# EAGLE board LilyTiny-Panel (EAGLE 6.1), part 1 of 2
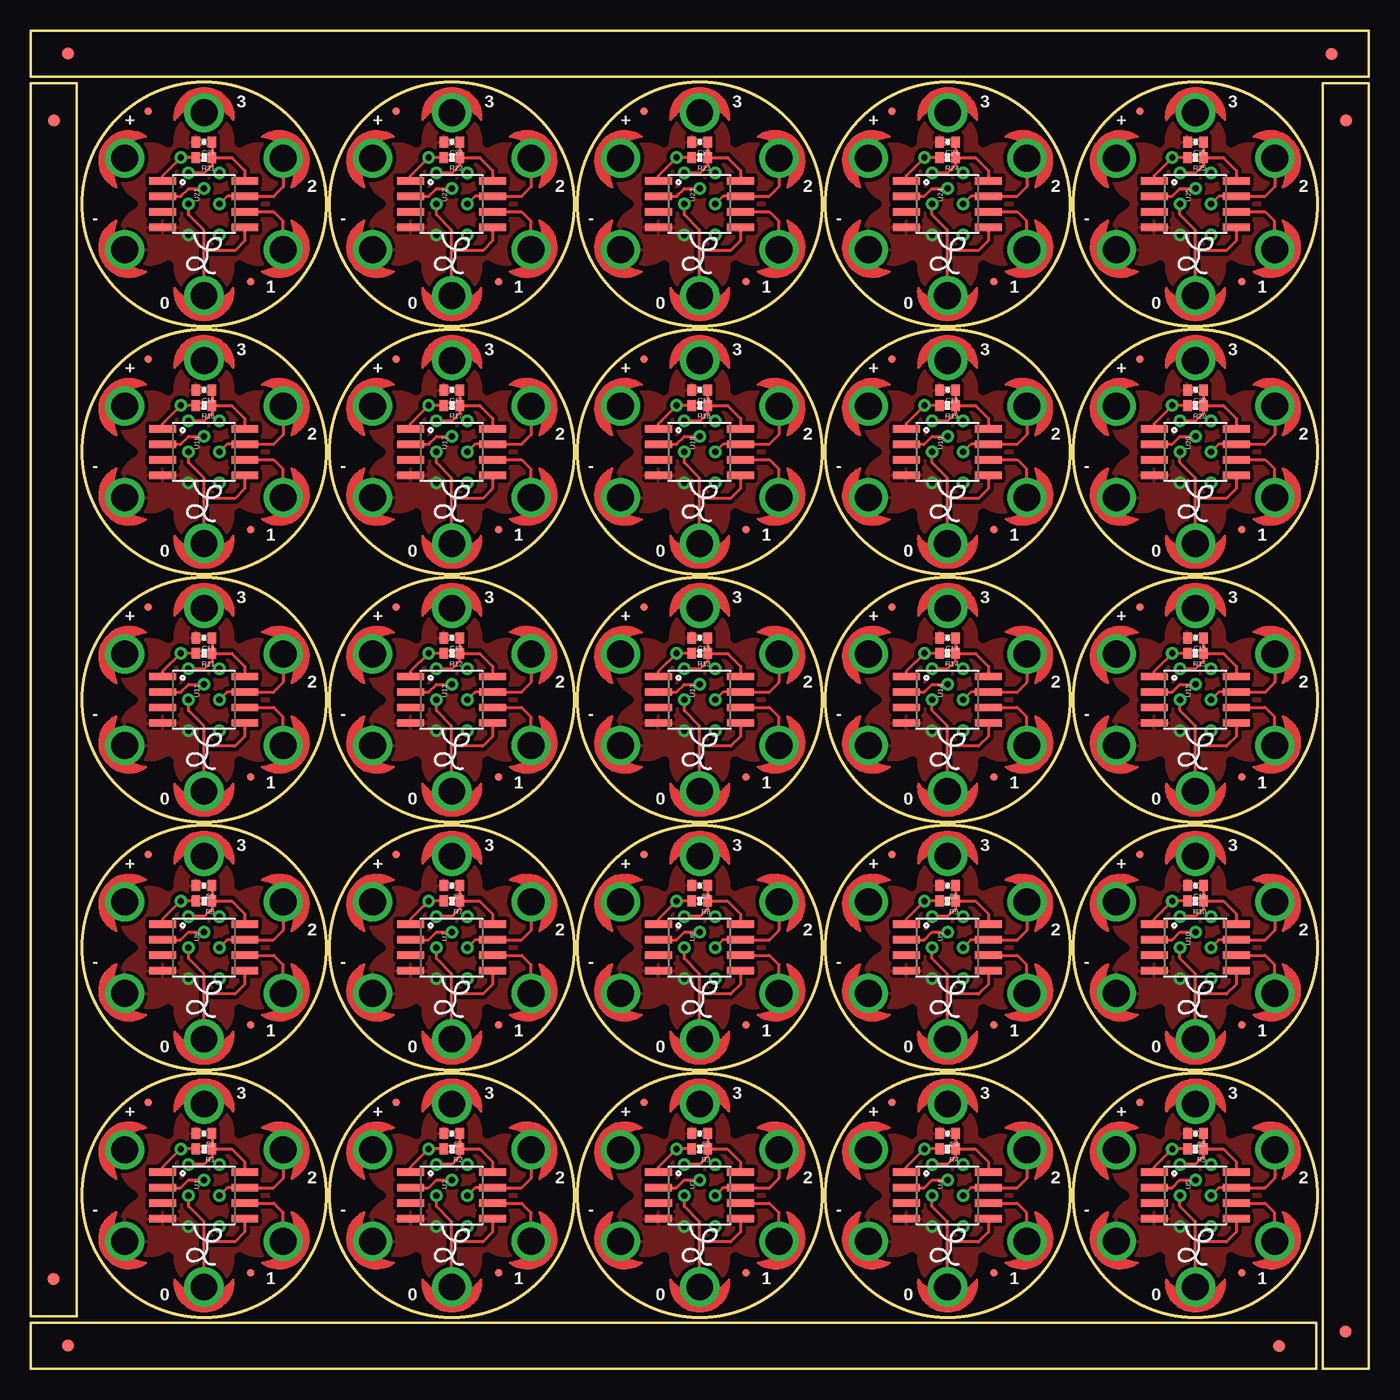
[diagram p0: board, top side]
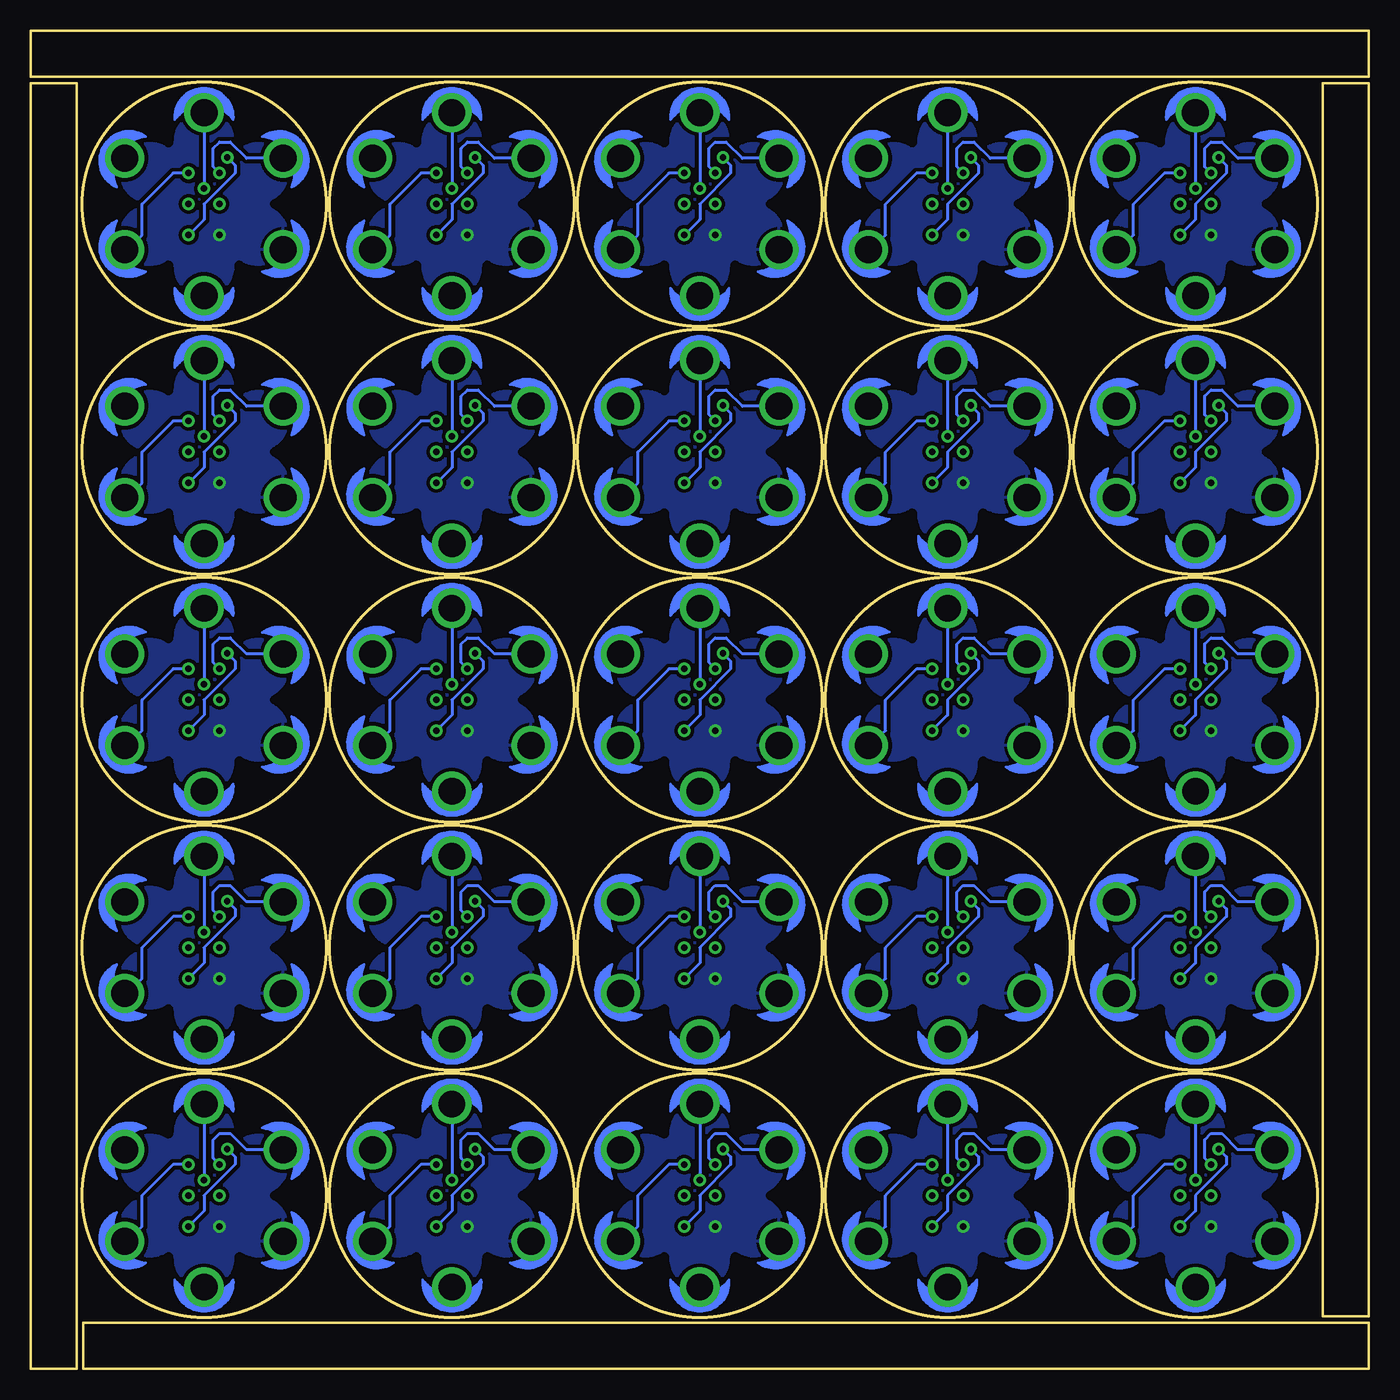
[diagram p1: board, bottom side, seen from below]

Size 109.73 x 109.73 mm. Coordinates in mm from the lower left corner, seen from the top.
Outline: 3.81,6.86 3.81,25.91
Outline: 3.81,25.91 3.81,93.22
Outline: 3.81,25.91 3.81,4.32 0,4.32 0,27.18
Outline: 2.54,0 21.59,0
Outline: 21.59,0 88.9,0
Outline: 21.59,0 0,0 0,3.81 22.86,3.81
Outline: 0,102.87 0,83.82
Outline: 0,83.82 0,16.51
Outline: 0,83.82 0,105.41 3.81,105.41 3.81,82.55
Outline: 105.92,102.87 105.92,83.82
Outline: 105.92,83.82 105.92,16.51
Outline: 105.92,83.82 105.92,105.41 109.73,105.41 109.73,82.55
Outline: 107.19,109.73 88.14,109.73
Outline: 88.14,109.73 20.83,109.73
Outline: 88.14,109.73 109.73,109.73 109.73,105.92 86.87,105.92
Outline: 2.54,105.92 21.59,105.92
Outline: 21.59,105.92 88.9,105.92
Outline: 21.59,105.92 0,105.92 0,109.73 22.86,109.73
Outline: 109.73,2.54 109.73,21.59
Outline: 109.73,21.59 109.73,88.9
Outline: 109.73,21.59 109.73,0 105.92,0 105.92,22.86
Outline: 102.87,3.81 83.82,3.81
Outline: 83.82,3.81 16.51,3.81
Outline: 83.82,3.81 105.41,3.81 105.41,0 82.55,0
Outline: circle at 14.22,14.22 radius 10
Outline: circle at 34.54,14.22 radius 10
Outline: circle at 54.86,14.22 radius 10
Outline: circle at 75.18,14.22 radius 10
Outline: circle at 95.5,14.22 radius 10
Outline: circle at 14.22,34.54 radius 10
Outline: circle at 34.54,34.54 radius 10
Outline: circle at 54.86,34.54 radius 10
Outline: circle at 75.18,34.54 radius 10
Outline: circle at 95.5,34.54 radius 10
Outline: circle at 14.22,54.86 radius 10
Outline: circle at 34.54,54.86 radius 10
Outline: circle at 54.86,54.86 radius 10
Outline: circle at 75.18,54.86 radius 10
Outline: circle at 95.5,54.86 radius 10
Outline: circle at 14.22,75.18 radius 10
Outline: circle at 34.54,75.18 radius 10
Outline: circle at 54.86,75.18 radius 10
Outline: circle at 75.18,75.18 radius 10
Outline: circle at 95.5,75.18 radius 10
Copper layers (1*16): Top 0.035mm / dielectric 1.5mm / Bottom 0.035mm
Design rules: minimum track width 8mil, minimum drill 20mil, track to track 8mil, track to pad 8mil, pad to pad 8mil, via to via 8mil, smd to smd 8mil, copper to edge 8mil, drill to drill 8mil, minimum pad ring 12mil, minimum via ring 10mil, stop-mask expansion 4mil, vias tented up to drill 20mil, thermal gap 10mil
tRestrict: area 3.2,14.2 to 14.2,25.2; area 14.2,14.2 to 25.2,25.2; area 14.2,3.2 to 25.2,14.2; area 3.2,3.2 to 14.2,14.2; area 23.5,14.2 to 34.5,25.2; area 34.5,14.2 to 45.5,25.2; area 34.5,3.2 to 45.5,14.2; area 23.5,3.2 to 34.5,14.2; area 43.9,14.2 to 54.9,25.2; area 54.9,14.2 to 65.9,25.2; area 54.9,3.2 to 65.9,14.2; area 43.9,3.2 to 54.9,14.2; area 64.2,14.2 to 75.2,25.2; area 75.2,14.2 to 86.2,25.2; area 75.2,3.2 to 86.2,14.2; area 64.2,3.2 to 75.2,14.2; area 84.5,14.2 to 95.5,25.2; area 95.5,14.2 to 106.5,25.2; area 95.5,3.2 to 106.5,14.2; area 84.5,3.2 to 95.5,14.2; area 3.2,34.5 to 14.2,45.5; area 14.2,34.5 to 25.2,45.5; area 14.2,23.5 to 25.2,34.5; area 3.2,23.5 to 14.2,34.5; area 23.5,34.5 to 34.5,45.5; area 34.5,34.5 to 45.5,45.5; area 34.5,23.5 to 45.5,34.5; area 23.5,23.5 to 34.5,34.5; area 43.9,34.5 to 54.9,45.5; area 54.9,34.5 to 65.9,45.5; area 54.9,23.5 to 65.9,34.5; area 43.9,23.5 to 54.9,34.5; area 64.2,34.5 to 75.2,45.5; area 75.2,34.5 to 86.2,45.5; area 75.2,23.5 to 86.2,34.5; area 64.2,23.5 to 75.2,34.5; area 84.5,34.5 to 95.5,45.5; area 95.5,34.5 to 106.5,45.5; area 95.5,23.5 to 106.5,34.5; area 84.5,23.5 to 95.5,34.5; area 3.2,54.9 to 14.2,65.9; area 14.2,54.9 to 25.2,65.9; area 14.2,43.9 to 25.2,54.9; area 3.2,43.9 to 14.2,54.9; area 23.5,54.9 to 34.5,65.9; area 34.5,54.9 to 45.5,65.9; area 34.5,43.9 to 45.5,54.9; area 23.5,43.9 to 34.5,54.9; area 43.9,54.9 to 54.9,65.9; area 54.9,54.9 to 65.9,65.9; area 54.9,43.9 to 65.9,54.9; area 43.9,43.9 to 54.9,54.9; area 64.2,54.9 to 75.2,65.9; area 75.2,54.9 to 86.2,65.9; area 75.2,43.9 to 86.2,54.9; area 64.2,43.9 to 75.2,54.9; area 84.5,54.9 to 95.5,65.9; area 95.5,54.9 to 106.5,65.9; area 95.5,43.9 to 106.5,54.9; area 84.5,43.9 to 95.5,54.9; area 3.2,75.2 to 14.2,86.2; area 14.2,75.2 to 25.2,86.2; area 14.2,64.2 to 25.2,75.2; area 3.2,64.2 to 14.2,75.2; area 23.5,75.2 to 34.5,86.2; area 34.5,75.2 to 45.5,86.2; area 34.5,64.2 to 45.5,75.2; area 23.5,64.2 to 34.5,75.2; area 43.9,75.2 to 54.9,86.2; area 54.9,75.2 to 65.9,86.2; area 54.9,64.2 to 65.9,75.2; area 43.9,64.2 to 54.9,75.2; area 64.2,75.2 to 75.2,86.2; area 75.2,75.2 to 86.2,86.2; area 75.2,64.2 to 86.2,75.2; area 64.2,64.2 to 75.2,75.2; area 84.5,75.2 to 95.5,86.2; area 95.5,75.2 to 106.5,86.2; area 95.5,64.2 to 106.5,75.2; area 84.5,64.2 to 95.5,75.2; area 3.2,95.5 to 14.2,106.5; area 14.2,95.5 to 25.2,106.5; area 14.2,84.5 to 25.2,95.5; area 3.2,84.5 to 14.2,95.5; area 23.5,95.5 to 34.5,106.5; area 34.5,95.5 to 45.5,106.5; area 34.5,84.5 to 45.5,95.5; area 23.5,84.5 to 34.5,95.5; area 43.9,95.5 to 54.9,106.5; area 54.9,95.5 to 65.9,106.5; area 54.9,84.5 to 65.9,95.5; area 43.9,84.5 to 54.9,95.5; area 64.2,95.5 to 75.2,106.5; area 75.2,95.5 to 86.2,106.5; area 75.2,84.5 to 86.2,95.5; area 64.2,84.5 to 75.2,95.5; area 84.5,95.5 to 95.5,106.5; area 95.5,95.5 to 106.5,106.5; area 95.5,84.5 to 106.5,95.5; area 84.5,84.5 to 95.5,95.5; 150 lines
bRestrict: area 3.2,14.2 to 14.2,25.2; area 14.2,14.2 to 25.2,25.2; area 14.2,3.2 to 25.2,14.2; area 3.2,3.2 to 14.2,14.2; area 23.5,14.2 to 34.5,25.2; area 34.5,14.2 to 45.5,25.2; area 34.5,3.2 to 45.5,14.2; area 23.5,3.2 to 34.5,14.2; area 43.9,14.2 to 54.9,25.2; area 54.9,14.2 to 65.9,25.2; area 54.9,3.2 to 65.9,14.2; area 43.9,3.2 to 54.9,14.2; area 64.2,14.2 to 75.2,25.2; area 75.2,14.2 to 86.2,25.2; area 75.2,3.2 to 86.2,14.2; area 64.2,3.2 to 75.2,14.2; area 84.5,14.2 to 95.5,25.2; area 95.5,14.2 to 106.5,25.2; area 95.5,3.2 to 106.5,14.2; area 84.5,3.2 to 95.5,14.2; area 3.2,34.5 to 14.2,45.5; area 14.2,34.5 to 25.2,45.5; area 14.2,23.5 to 25.2,34.5; area 3.2,23.5 to 14.2,34.5; area 23.5,34.5 to 34.5,45.5; area 34.5,34.5 to 45.5,45.5; area 34.5,23.5 to 45.5,34.5; area 23.5,23.5 to 34.5,34.5; area 43.9,34.5 to 54.9,45.5; area 54.9,34.5 to 65.9,45.5; area 54.9,23.5 to 65.9,34.5; area 43.9,23.5 to 54.9,34.5; area 64.2,34.5 to 75.2,45.5; area 75.2,34.5 to 86.2,45.5; area 75.2,23.5 to 86.2,34.5; area 64.2,23.5 to 75.2,34.5; area 84.5,34.5 to 95.5,45.5; area 95.5,34.5 to 106.5,45.5; area 95.5,23.5 to 106.5,34.5; area 84.5,23.5 to 95.5,34.5; area 3.2,54.9 to 14.2,65.9; area 14.2,54.9 to 25.2,65.9; area 14.2,43.9 to 25.2,54.9; area 3.2,43.9 to 14.2,54.9; area 23.5,54.9 to 34.5,65.9; area 34.5,54.9 to 45.5,65.9; area 34.5,43.9 to 45.5,54.9; area 23.5,43.9 to 34.5,54.9; area 43.9,54.9 to 54.9,65.9; area 54.9,54.9 to 65.9,65.9; area 54.9,43.9 to 65.9,54.9; area 43.9,43.9 to 54.9,54.9; area 64.2,54.9 to 75.2,65.9; area 75.2,54.9 to 86.2,65.9; area 75.2,43.9 to 86.2,54.9; area 64.2,43.9 to 75.2,54.9; area 84.5,54.9 to 95.5,65.9; area 95.5,54.9 to 106.5,65.9; area 95.5,43.9 to 106.5,54.9; area 84.5,43.9 to 95.5,54.9; area 3.2,75.2 to 14.2,86.2; area 14.2,75.2 to 25.2,86.2; area 14.2,64.2 to 25.2,75.2; area 3.2,64.2 to 14.2,75.2; area 23.5,75.2 to 34.5,86.2; area 34.5,75.2 to 45.5,86.2; area 34.5,64.2 to 45.5,75.2; area 23.5,64.2 to 34.5,75.2; area 43.9,75.2 to 54.9,86.2; area 54.9,75.2 to 65.9,86.2; area 54.9,64.2 to 65.9,75.2; area 43.9,64.2 to 54.9,75.2; area 64.2,75.2 to 75.2,86.2; area 75.2,75.2 to 86.2,86.2; area 75.2,64.2 to 86.2,75.2; area 64.2,64.2 to 75.2,75.2; area 84.5,75.2 to 95.5,86.2; area 95.5,75.2 to 106.5,86.2; area 95.5,64.2 to 106.5,75.2; area 84.5,64.2 to 95.5,75.2; area 3.2,95.5 to 14.2,106.5; area 14.2,95.5 to 25.2,106.5; area 14.2,84.5 to 25.2,95.5; area 3.2,84.5 to 14.2,95.5; area 23.5,95.5 to 34.5,106.5; area 34.5,95.5 to 45.5,106.5; area 34.5,84.5 to 45.5,95.5; area 23.5,84.5 to 34.5,95.5; area 43.9,95.5 to 54.9,106.5; area 54.9,95.5 to 65.9,106.5; area 54.9,84.5 to 65.9,95.5; area 43.9,84.5 to 54.9,95.5; area 64.2,95.5 to 75.2,106.5; area 75.2,95.5 to 86.2,106.5; area 75.2,84.5 to 86.2,95.5; area 64.2,84.5 to 75.2,95.5; area 84.5,95.5 to 95.5,106.5; area 95.5,95.5 to 106.5,106.5; area 95.5,84.5 to 106.5,95.5; area 84.5,84.5 to 95.5,95.5; 150 lines

## Footprints (pad centres in the part's own frame; a part is rotated, then mirrored left to right if it is on the bottom)
0402-CAP = smd 0.7 x 0.9: 1 -0.65,0; 2 0.65,0
FIDUCIAL-1X2 = smd 1 x 1: 1 0,0
MICRO-FIDUCIAL = smd 0.635 x 0.635: 1 0,0
0402-RES = smd 0.7 x 0.9: 1 -0.65,0; 2 0.65,0
SO08-EIAJ = smd 0.61 x 2.21: 1 -1.905,-3.378; 2 -0.635,-3.378; 3 0.635,-3.378; 4 1.905,-3.378; 5 1.905,3.353; 6 0.635,3.353; 7 -0.635,3.353; 8 -1.905,3.353
PETAL-SMALL-2SIDE = drill 2.2: 1 0,0

## Placement (x,y rotation side)
C1  0.1uF  [0402-CAP]  14.22,19.3 180 top
C2  0.1uF  [0402-CAP]  34.54,19.3 180 top
C3  0.1uF  [0402-CAP]  54.86,19.3 180 top
C4  0.1uF  [0402-CAP]  75.18,19.3 180 top
C5  0.1uF  [0402-CAP]  95.5,19.3 180 top
C6  0.1uF  [0402-CAP]  14.22,39.62 180 top
C7  0.1uF  [0402-CAP]  34.54,39.62 180 top
C8  0.1uF  [0402-CAP]  54.86,39.62 180 top
C9  0.1uF  [0402-CAP]  75.18,39.62 180 top
C10  0.1uF  [0402-CAP]  95.5,39.62 180 top
C11  0.1uF  [0402-CAP]  14.22,59.94 180 top
C12  0.1uF  [0402-CAP]  34.54,59.94 180 top
C13  0.1uF  [0402-CAP]  54.86,59.94 180 top
C14  0.1uF  [0402-CAP]  75.18,59.94 180 top
C15  0.1uF  [0402-CAP]  95.5,59.94 180 top
C16  0.1uF  [0402-CAP]  14.22,80.26 180 top
C17  0.1uF  [0402-CAP]  34.54,80.26 180 top
C18  0.1uF  [0402-CAP]  54.86,80.26 180 top
C19  0.1uF  [0402-CAP]  75.18,80.26 180 top
C20  0.1uF  [0402-CAP]  95.5,80.26 180 top
C21  0.1uF  [0402-CAP]  14.22,100.58 180 top
C22  0.1uF  [0402-CAP]  34.54,100.58 180 top
C23  0.1uF  [0402-CAP]  54.86,100.58 180 top
C24  0.1uF  [0402-CAP]  75.18,100.58 180 top
C25  0.1uF  [0402-CAP]  95.5,100.58 180 top
E$1  [FIDUCIAL-1X2]  3.07,1.93 90 top
E$2  [FIDUCIAL-1X2]  1.88,7.39 180 top
E$3  [FIDUCIAL-1X2]  1.93,102.34 0 top
E$4  [FIDUCIAL-1X2]  107.85,102.34 0 top
E$5  [FIDUCIAL-1X2]  106.65,107.8 270 top
E$6  [FIDUCIAL-1X2]  3.07,107.85 90 top
E$7  [FIDUCIAL-1X2]  107.8,3.07 180 top
E$8  [FIDUCIAL-1X2]  102.34,1.88 270 top
JP1  FIDUCIALUFIDUCIAL  [MICRO-FIDUCIAL]  9.65,21.84 0 top
JP2  FIDUCIALUFIDUCIAL  [MICRO-FIDUCIAL]  18.03,7.87 0 top
JP3  FIDUCIALUFIDUCIAL  [MICRO-FIDUCIAL]  29.97,21.84 0 top
JP4  FIDUCIALUFIDUCIAL  [MICRO-FIDUCIAL]  38.35,7.87 0 top
JP5  FIDUCIALUFIDUCIAL  [MICRO-FIDUCIAL]  50.29,21.84 0 top
JP6  FIDUCIALUFIDUCIAL  [MICRO-FIDUCIAL]  58.67,7.87 0 top
JP7  FIDUCIALUFIDUCIAL  [MICRO-FIDUCIAL]  70.61,21.84 0 top
JP8  FIDUCIALUFIDUCIAL  [MICRO-FIDUCIAL]  78.99,7.87 0 top
JP9  FIDUCIALUFIDUCIAL  [MICRO-FIDUCIAL]  90.93,21.84 0 top
JP10  FIDUCIALUFIDUCIAL  [MICRO-FIDUCIAL]  99.31,7.87 0 top
JP11  FIDUCIALUFIDUCIAL  [MICRO-FIDUCIAL]  9.65,42.16 0 top
JP12  FIDUCIALUFIDUCIAL  [MICRO-FIDUCIAL]  18.03,28.19 0 top
JP13  FIDUCIALUFIDUCIAL  [MICRO-FIDUCIAL]  29.97,42.16 0 top
JP14  FIDUCIALUFIDUCIAL  [MICRO-FIDUCIAL]  38.35,28.19 0 top
JP15  FIDUCIALUFIDUCIAL  [MICRO-FIDUCIAL]  50.29,42.16 0 top
JP16  FIDUCIALUFIDUCIAL  [MICRO-FIDUCIAL]  58.67,28.19 0 top
JP17  FIDUCIALUFIDUCIAL  [MICRO-FIDUCIAL]  70.61,42.16 0 top
JP18  FIDUCIALUFIDUCIAL  [MICRO-FIDUCIAL]  78.99,28.19 0 top
JP19  FIDUCIALUFIDUCIAL  [MICRO-FIDUCIAL]  90.93,42.16 0 top
JP20  FIDUCIALUFIDUCIAL  [MICRO-FIDUCIAL]  99.31,28.19 0 top
JP21  FIDUCIALUFIDUCIAL  [MICRO-FIDUCIAL]  9.65,62.48 0 top
JP22  FIDUCIALUFIDUCIAL  [MICRO-FIDUCIAL]  18.03,48.51 0 top
JP23  FIDUCIALUFIDUCIAL  [MICRO-FIDUCIAL]  29.97,62.48 0 top
JP24  FIDUCIALUFIDUCIAL  [MICRO-FIDUCIAL]  38.35,48.51 0 top
JP25  FIDUCIALUFIDUCIAL  [MICRO-FIDUCIAL]  50.29,62.48 0 top
JP26  FIDUCIALUFIDUCIAL  [MICRO-FIDUCIAL]  58.67,48.51 0 top
JP27  FIDUCIALUFIDUCIAL  [MICRO-FIDUCIAL]  70.61,62.48 0 top
JP28  FIDUCIALUFIDUCIAL  [MICRO-FIDUCIAL]  78.99,48.51 0 top
JP29  FIDUCIALUFIDUCIAL  [MICRO-FIDUCIAL]  90.93,62.48 0 top
JP30  FIDUCIALUFIDUCIAL  [MICRO-FIDUCIAL]  99.31,48.51 0 top
JP31  FIDUCIALUFIDUCIAL  [MICRO-FIDUCIAL]  9.65,82.8 0 top
JP32  FIDUCIALUFIDUCIAL  [MICRO-FIDUCIAL]  18.03,68.83 0 top
JP33  FIDUCIALUFIDUCIAL  [MICRO-FIDUCIAL]  29.97,82.8 0 top
JP34  FIDUCIALUFIDUCIAL  [MICRO-FIDUCIAL]  38.35,68.83 0 top
JP35  FIDUCIALUFIDUCIAL  [MICRO-FIDUCIAL]  50.29,82.8 0 top
JP36  FIDUCIALUFIDUCIAL  [MICRO-FIDUCIAL]  58.67,68.83 0 top
JP37  FIDUCIALUFIDUCIAL  [MICRO-FIDUCIAL]  70.61,82.8 0 top
JP38  FIDUCIALUFIDUCIAL  [MICRO-FIDUCIAL]  78.99,68.83 0 top
JP39  FIDUCIALUFIDUCIAL  [MICRO-FIDUCIAL]  90.93,82.8 0 top
JP40  FIDUCIALUFIDUCIAL  [MICRO-FIDUCIAL]  99.31,68.83 0 top
JP41  FIDUCIALUFIDUCIAL  [MICRO-FIDUCIAL]  9.65,103.12 0 top
JP42  FIDUCIALUFIDUCIAL  [MICRO-FIDUCIAL]  18.03,89.15 0 top
JP43  FIDUCIALUFIDUCIAL  [MICRO-FIDUCIAL]  29.97,103.12 0 top
JP44  FIDUCIALUFIDUCIAL  [MICRO-FIDUCIAL]  38.35,89.15 0 top
JP45  FIDUCIALUFIDUCIAL  [MICRO-FIDUCIAL]  50.29,103.12 0 top
JP46  FIDUCIALUFIDUCIAL  [MICRO-FIDUCIAL]  58.67,89.15 0 top
JP47  FIDUCIALUFIDUCIAL  [MICRO-FIDUCIAL]  70.61,103.12 0 top
JP48  FIDUCIALUFIDUCIAL  [MICRO-FIDUCIAL]  78.99,89.15 0 top
JP49  FIDUCIALUFIDUCIAL  [MICRO-FIDUCIAL]  90.93,103.12 0 top
JP50  FIDUCIALUFIDUCIAL  [MICRO-FIDUCIAL]  99.31,89.15 0 top
R1  10k  [0402-RES]  14.22,18.03 180 top
R2  10k  [0402-RES]  34.54,18.03 180 top
R3  10k  [0402-RES]  54.86,18.03 180 top
R4  10k  [0402-RES]  75.18,18.03 180 top
R5  10k  [0402-RES]  95.5,18.03 180 top
R6  10k  [0402-RES]  14.22,38.35 180 top
R7  10k  [0402-RES]  34.54,38.35 180 top
R8  10k  [0402-RES]  54.86,38.35 180 top
R9  10k  [0402-RES]  75.18,38.35 180 top
R10  10k  [0402-RES]  95.5,38.35 180 top
R11  10k  [0402-RES]  14.22,58.67 180 top
R12  10k  [0402-RES]  34.54,58.67 180 top
R13  10k  [0402-RES]  54.86,58.67 180 top
R14  10k  [0402-RES]  75.18,58.67 180 top
R15  10k  [0402-RES]  95.5,58.67 180 top
R16  10k  [0402-RES]  14.22,78.99 180 top
R17  10k  [0402-RES]  34.54,78.99 180 top
R18  10k  [0402-RES]  54.86,78.99 180 top
R19  10k  [0402-RES]  75.18,78.99 180 top
R20  10k  [0402-RES]  95.5,78.99 180 top
R21  10k  [0402-RES]  14.22,99.31 180 top
R22  10k  [0402-RES]  34.54,99.31 180 top
R23  10k  [0402-RES]  54.86,99.31 180 top
R24  10k  [0402-RES]  75.18,99.31 180 top
R25  10k  [0402-RES]  95.5,99.31 180 top
U1  ATTINY85  [SO08-EIAJ]  14.22,14.22 270 top
U2  ATTINY85  [SO08-EIAJ]  34.54,14.22 270 top
U3  ATTINY85  [SO08-EIAJ]  54.86,14.22 270 top
U4  ATTINY85  [SO08-EIAJ]  75.18,14.22 270 top
U5  ATTINY85  [SO08-EIAJ]  95.5,14.22 270 top
U6  ATTINY85  [SO08-EIAJ]  14.22,34.54 270 top
U7  ATTINY85  [SO08-EIAJ]  34.54,34.54 270 top
U8  ATTINY85  [SO08-EIAJ]  54.86,34.54 270 top
U9  ATTINY85  [SO08-EIAJ]  75.18,34.54 270 top
U10  ATTINY85  [SO08-EIAJ]  95.5,34.54 270 top
U11  ATTINY85  [SO08-EIAJ]  14.22,54.86 270 top
U12  ATTINY85  [SO08-EIAJ]  34.54,54.86 270 top
U13  ATTINY85  [SO08-EIAJ]  54.86,54.86 270 top
U14  ATTINY85  [SO08-EIAJ]  75.18,54.86 270 top
U15  ATTINY85  [SO08-EIAJ]  95.5,54.86 270 top
U16  ATTINY85  [SO08-EIAJ]  14.22,75.18 270 top
U17  ATTINY85  [SO08-EIAJ]  34.54,75.18 270 top
U18  ATTINY85  [SO08-EIAJ]  54.86,75.18 270 top
U19  ATTINY85  [SO08-EIAJ]  75.18,75.18 270 top
U20  ATTINY85  [SO08-EIAJ]  95.5,75.18 270 top
U21  ATTINY85  [SO08-EIAJ]  14.22,95.5 270 top
U22  ATTINY85  [SO08-EIAJ]  34.54,95.5 270 top
U23  ATTINY85  [SO08-EIAJ]  54.86,95.5 270 top
U24  ATTINY85  [SO08-EIAJ]  75.18,95.5 270 top
U25  ATTINY85  [SO08-EIAJ]  95.5,95.5 270 top
U$1  SEWTAP6  [PETAL-SMALL-2SIDE]  28.05,10.47 300 top
U$2  SEWTAP6  [PETAL-SMALL-2SIDE]  7.73,10.47 300 top
U$3  SEWTAP6  [PETAL-SMALL-2SIDE]  20.72,10.47 60 top
U$4  SEWTAP6  [PETAL-SMALL-2SIDE]  20.72,17.98 120 top
U$5  SEWTAP6  [PETAL-SMALL-2SIDE]  7.73,17.98 240 top
U$6  SEWTAP6  [PETAL-SMALL-2SIDE]  14.22,21.72 180 top
U$7  SEWTAP6  [PETAL-SMALL-2SIDE]  14.22,6.72 0 top
U$8  LOGO-LPL  [LOGO-L]  14.22,10.16 0 top
U$9  SEWTAP6  [PETAL-SMALL-2SIDE]  41.04,10.47 60 top
U$10  SEWTAP6  [PETAL-SMALL-2SIDE]  41.04,17.98 120 top
U$11  SEWTAP6  [PETAL-SMALL-2SIDE]  28.05,17.98 240 top
U$12  SEWTAP6  [PETAL-SMALL-2SIDE]  34.54,21.72 180 top
U$13  SEWTAP6  [PETAL-SMALL-2SIDE]  34.54,6.72 0 top
U$14  LOGO-LPL  [LOGO-L]  34.54,10.16 0 top
U$15  SEWTAP6  [PETAL-SMALL-2SIDE]  48.37,10.47 300 top
U$16  SEWTAP6  [PETAL-SMALL-2SIDE]  61.36,10.47 60 top
U$17  SEWTAP6  [PETAL-SMALL-2SIDE]  61.36,17.98 120 top
U$18  SEWTAP6  [PETAL-SMALL-2SIDE]  48.37,17.98 240 top
U$19  SEWTAP6  [PETAL-SMALL-2SIDE]  54.86,21.72 180 top
U$20  SEWTAP6  [PETAL-SMALL-2SIDE]  54.86,6.72 0 top
U$21  LOGO-LPL  [LOGO-L]  54.86,10.16 0 top
U$22  SEWTAP6  [PETAL-SMALL-2SIDE]  68.69,10.47 300 top
U$23  SEWTAP6  [PETAL-SMALL-2SIDE]  81.68,10.47 60 top
U$24  SEWTAP6  [PETAL-SMALL-2SIDE]  81.68,17.98 120 top
U$25  SEWTAP6  [PETAL-SMALL-2SIDE]  68.69,17.98 240 top
U$26  SEWTAP6  [PETAL-SMALL-2SIDE]  75.18,21.72 180 top
U$27  SEWTAP6  [PETAL-SMALL-2SIDE]  75.18,6.72 0 top
U$28  LOGO-LPL  [LOGO-L]  75.18,10.16 0 top
U$29  SEWTAP6  [PETAL-SMALL-2SIDE]  89.01,10.47 300 top
U$30  SEWTAP6  [PETAL-SMALL-2SIDE]  102,10.47 60 top
U$31  SEWTAP6  [PETAL-SMALL-2SIDE]  102,17.98 120 top
U$32  SEWTAP6  [PETAL-SMALL-2SIDE]  89.01,17.98 240 top
U$33  SEWTAP6  [PETAL-SMALL-2SIDE]  95.5,21.72 180 top
U$34  SEWTAP6  [PETAL-SMALL-2SIDE]  95.5,6.72 0 top
U$35  LOGO-LPL  [LOGO-L]  95.5,10.16 0 top
U$36  SEWTAP6  [PETAL-SMALL-2SIDE]  7.73,30.79 300 top
U$37  SEWTAP6  [PETAL-SMALL-2SIDE]  20.72,30.79 60 top
U$38  SEWTAP6  [PETAL-SMALL-2SIDE]  20.72,38.3 120 top
U$39  SEWTAP6  [PETAL-SMALL-2SIDE]  7.73,38.3 240 top
U$40  SEWTAP6  [PETAL-SMALL-2SIDE]  14.22,42.04 180 top
U$41  SEWTAP6  [PETAL-SMALL-2SIDE]  14.22,27.04 0 top
U$42  LOGO-LPL  [LOGO-L]  14.22,30.48 0 top
U$43  SEWTAP6  [PETAL-SMALL-2SIDE]  28.05,30.79 300 top
U$44  SEWTAP6  [PETAL-SMALL-2SIDE]  41.04,30.79 60 top
U$45  SEWTAP6  [PETAL-SMALL-2SIDE]  41.04,38.3 120 top
U$46  SEWTAP6  [PETAL-SMALL-2SIDE]  28.05,38.3 240 top
U$47  SEWTAP6  [PETAL-SMALL-2SIDE]  34.54,42.04 180 top
U$48  SEWTAP6  [PETAL-SMALL-2SIDE]  34.54,27.04 0 top
U$49  LOGO-LPL  [LOGO-L]  34.54,30.48 0 top
U$50  SEWTAP6  [PETAL-SMALL-2SIDE]  48.37,30.79 300 top
U$51  SEWTAP6  [PETAL-SMALL-2SIDE]  61.36,30.79 60 top
U$52  SEWTAP6  [PETAL-SMALL-2SIDE]  61.36,38.3 120 top
U$53  SEWTAP6  [PETAL-SMALL-2SIDE]  48.37,38.3 240 top
U$54  SEWTAP6  [PETAL-SMALL-2SIDE]  54.86,42.04 180 top
U$55  SEWTAP6  [PETAL-SMALL-2SIDE]  54.86,27.04 0 top
U$56  LOGO-LPL  [LOGO-L]  54.86,30.48 0 top
U$57  SEWTAP6  [PETAL-SMALL-2SIDE]  68.69,30.79 300 top
U$58  SEWTAP6  [PETAL-SMALL-2SIDE]  81.68,30.79 60 top
U$59  SEWTAP6  [PETAL-SMALL-2SIDE]  81.68,38.3 120 top
U$60  SEWTAP6  [PETAL-SMALL-2SIDE]  68.69,38.3 240 top
U$61  SEWTAP6  [PETAL-SMALL-2SIDE]  75.18,42.04 180 top
U$62  SEWTAP6  [PETAL-SMALL-2SIDE]  75.18,27.04 0 top
U$63  LOGO-LPL  [LOGO-L]  75.18,30.48 0 top
U$64  SEWTAP6  [PETAL-SMALL-2SIDE]  89.01,30.79 300 top
U$65  SEWTAP6  [PETAL-SMALL-2SIDE]  102,30.79 60 top
U$66  SEWTAP6  [PETAL-SMALL-2SIDE]  102,38.3 120 top
U$67  SEWTAP6  [PETAL-SMALL-2SIDE]  89.01,38.3 240 top
U$68  SEWTAP6  [PETAL-SMALL-2SIDE]  95.5,42.04 180 top
U$69  SEWTAP6  [PETAL-SMALL-2SIDE]  95.5,27.04 0 top
U$70  LOGO-LPL  [LOGO-L]  95.5,30.48 0 top
U$71  SEWTAP6  [PETAL-SMALL-2SIDE]  7.73,51.11 300 top
U$72  SEWTAP6  [PETAL-SMALL-2SIDE]  20.72,51.11 60 top
U$73  SEWTAP6  [PETAL-SMALL-2SIDE]  20.72,58.62 120 top
U$74  SEWTAP6  [PETAL-SMALL-2SIDE]  7.73,58.62 240 top
U$75  SEWTAP6  [PETAL-SMALL-2SIDE]  14.22,62.36 180 top
U$76  SEWTAP6  [PETAL-SMALL-2SIDE]  14.22,47.36 0 top
U$77  LOGO-LPL  [LOGO-L]  14.22,50.8 0 top
U$78  SEWTAP6  [PETAL-SMALL-2SIDE]  28.05,51.11 300 top
U$79  SEWTAP6  [PETAL-SMALL-2SIDE]  41.04,51.11 60 top
U$80  SEWTAP6  [PETAL-SMALL-2SIDE]  41.04,58.62 120 top
U$81  SEWTAP6  [PETAL-SMALL-2SIDE]  28.05,58.62 240 top
U$82  SEWTAP6  [PETAL-SMALL-2SIDE]  34.54,62.36 180 top
U$83  SEWTAP6  [PETAL-SMALL-2SIDE]  34.54,47.36 0 top
U$84  LOGO-LPL  [LOGO-L]  34.54,50.8 0 top
U$85  SEWTAP6  [PETAL-SMALL-2SIDE]  48.37,51.11 300 top
U$86  SEWTAP6  [PETAL-SMALL-2SIDE]  61.36,51.11 60 top
U$87  SEWTAP6  [PETAL-SMALL-2SIDE]  61.36,58.62 120 top
U$88  SEWTAP6  [PETAL-SMALL-2SIDE]  48.37,58.62 240 top
U$89  SEWTAP6  [PETAL-SMALL-2SIDE]  54.86,62.36 180 top
U$90  SEWTAP6  [PETAL-SMALL-2SIDE]  54.86,47.36 0 top
U$91  LOGO-LPL  [LOGO-L]  54.86,50.8 0 top
U$92  SEWTAP6  [PETAL-SMALL-2SIDE]  68.69,51.11 300 top
U$93  SEWTAP6  [PETAL-SMALL-2SIDE]  81.68,51.11 60 top
U$94  SEWTAP6  [PETAL-SMALL-2SIDE]  81.68,58.62 120 top
U$95  SEWTAP6  [PETAL-SMALL-2SIDE]  68.69,58.62 240 top
U$96  SEWTAP6  [PETAL-SMALL-2SIDE]  75.18,62.36 180 top
U$97  SEWTAP6  [PETAL-SMALL-2SIDE]  75.18,47.36 0 top
U$98  LOGO-LPL  [LOGO-L]  75.18,50.8 0 top
U$99  SEWTAP6  [PETAL-SMALL-2SIDE]  89.01,51.11 300 top
U$100  SEWTAP6  [PETAL-SMALL-2SIDE]  102,51.11 60 top
U$101  SEWTAP6  [PETAL-SMALL-2SIDE]  102,58.62 120 top
U$102  SEWTAP6  [PETAL-SMALL-2SIDE]  89.01,58.62 240 top
U$103  SEWTAP6  [PETAL-SMALL-2SIDE]  95.5,62.36 180 top
U$104  SEWTAP6  [PETAL-SMALL-2SIDE]  95.5,47.36 0 top
U$105  LOGO-LPL  [LOGO-L]  95.5,50.8 0 top
U$106  SEWTAP6  [PETAL-SMALL-2SIDE]  7.73,71.43 300 top
U$107  SEWTAP6  [PETAL-SMALL-2SIDE]  20.72,71.43 60 top
U$108  SEWTAP6  [PETAL-SMALL-2SIDE]  20.72,78.94 120 top
U$109  SEWTAP6  [PETAL-SMALL-2SIDE]  7.73,78.94 240 top
U$110  SEWTAP6  [PETAL-SMALL-2SIDE]  14.22,82.68 180 top
U$111  SEWTAP6  [PETAL-SMALL-2SIDE]  14.22,67.68 0 top
U$112  LOGO-LPL  [LOGO-L]  14.22,71.12 0 top
U$113  SEWTAP6  [PETAL-SMALL-2SIDE]  28.05,71.43 300 top
U$114  SEWTAP6  [PETAL-SMALL-2SIDE]  41.04,71.43 60 top
U$115  SEWTAP6  [PETAL-SMALL-2SIDE]  41.04,78.94 120 top
U$116  SEWTAP6  [PETAL-SMALL-2SIDE]  28.05,78.94 240 top
U$117  SEWTAP6  [PETAL-SMALL-2SIDE]  34.54,82.68 180 top
U$118  SEWTAP6  [PETAL-SMALL-2SIDE]  34.54,67.68 0 top
U$119  LOGO-LPL  [LOGO-L]  34.54,71.12 0 top
U$120  SEWTAP6  [PETAL-SMALL-2SIDE]  48.37,71.43 300 top
U$121  SEWTAP6  [PETAL-SMALL-2SIDE]  61.36,71.43 60 top
U$122  SEWTAP6  [PETAL-SMALL-2SIDE]  61.36,78.94 120 top
U$123  SEWTAP6  [PETAL-SMALL-2SIDE]  48.37,78.94 240 top
U$124  SEWTAP6  [PETAL-SMALL-2SIDE]  54.86,82.68 180 top
U$125  SEWTAP6  [PETAL-SMALL-2SIDE]  54.86,67.68 0 top
U$126  LOGO-LPL  [LOGO-L]  54.86,71.12 0 top
U$127  SEWTAP6  [PETAL-SMALL-2SIDE]  68.69,71.43 300 top
U$128  SEWTAP6  [PETAL-SMALL-2SIDE]  81.68,71.43 60 top
U$129  SEWTAP6  [PETAL-SMALL-2SIDE]  81.68,78.94 120 top
U$130  SEWTAP6  [PETAL-SMALL-2SIDE]  68.69,78.94 240 top
U$131  SEWTAP6  [PETAL-SMALL-2SIDE]  75.18,82.68 180 top
U$132  SEWTAP6  [PETAL-SMALL-2SIDE]  75.18,67.68 0 top
U$133  LOGO-LPL  [LOGO-L]  75.18,71.12 0 top
U$134  SEWTAP6  [PETAL-SMALL-2SIDE]  89.01,71.43 300 top
U$135  SEWTAP6  [PETAL-SMALL-2SIDE]  102,71.43 60 top
U$136  SEWTAP6  [PETAL-SMALL-2SIDE]  102,78.94 120 top
U$137  SEWTAP6  [PETAL-SMALL-2SIDE]  89.01,78.94 240 top
U$138  SEWTAP6  [PETAL-SMALL-2SIDE]  95.5,82.68 180 top
U$139  SEWTAP6  [PETAL-SMALL-2SIDE]  95.5,67.68 0 top
U$140  LOGO-LPL  [LOGO-L]  95.5,71.12 0 top
U$141  SEWTAP6  [PETAL-SMALL-2SIDE]  7.73,91.75 300 top
U$142  SEWTAP6  [PETAL-SMALL-2SIDE]  20.72,91.75 60 top
U$143  SEWTAP6  [PETAL-SMALL-2SIDE]  20.72,99.26 120 top
U$144  SEWTAP6  [PETAL-SMALL-2SIDE]  7.73,99.26 240 top
U$145  SEWTAP6  [PETAL-SMALL-2SIDE]  14.22,103 180 top
U$146  SEWTAP6  [PETAL-SMALL-2SIDE]  14.22,88 0 top
U$147  LOGO-LPL  [LOGO-L]  14.22,91.44 0 top
U$148  SEWTAP6  [PETAL-SMALL-2SIDE]  28.05,91.75 300 top
U$149  SEWTAP6  [PETAL-SMALL-2SIDE]  41.04,91.75 60 top
U$150  SEWTAP6  [PETAL-SMALL-2SIDE]  41.04,99.26 120 top
U$151  SEWTAP6  [PETAL-SMALL-2SIDE]  28.05,99.26 240 top
U$152  SEWTAP6  [PETAL-SMALL-2SIDE]  34.54,103 180 top
U$153  SEWTAP6  [PETAL-SMALL-2SIDE]  34.54,88 0 top
U$154  LOGO-LPL  [LOGO-L]  34.54,91.44 0 top
U$155  SEWTAP6  [PETAL-SMALL-2SIDE]  48.37,91.75 300 top
U$156  SEWTAP6  [PETAL-SMALL-2SIDE]  61.36,91.75 60 top
U$157  SEWTAP6  [PETAL-SMALL-2SIDE]  61.36,99.26 120 top
U$158  SEWTAP6  [PETAL-SMALL-2SIDE]  48.37,99.26 240 top
U$159  SEWTAP6  [PETAL-SMALL-2SIDE]  54.86,103 180 top
U$160  SEWTAP6  [PETAL-SMALL-2SIDE]  54.86,88 0 top
U$161  LOGO-LPL  [LOGO-L]  54.86,91.44 0 top
U$162  SEWTAP6  [PETAL-SMALL-2SIDE]  68.69,91.75 300 top
U$163  SEWTAP6  [PETAL-SMALL-2SIDE]  81.68,91.75 60 top
U$164  SEWTAP6  [PETAL-SMALL-2SIDE]  81.68,99.26 120 top
U$165  SEWTAP6  [PETAL-SMALL-2SIDE]  68.69,99.26 240 top
U$166  SEWTAP6  [PETAL-SMALL-2SIDE]  75.18,103 180 top
U$167  SEWTAP6  [PETAL-SMALL-2SIDE]  75.18,88 0 top
U$168  LOGO-LPL  [LOGO-L]  75.18,91.44 0 top
U$169  SEWTAP6  [PETAL-SMALL-2SIDE]  89.01,91.75 300 top
U$170  SEWTAP6  [PETAL-SMALL-2SIDE]  102,91.75 60 top
U$171  SEWTAP6  [PETAL-SMALL-2SIDE]  102,99.26 120 top
U$172  SEWTAP6  [PETAL-SMALL-2SIDE]  89.01,99.26 240 top
U$173  SEWTAP6  [PETAL-SMALL-2SIDE]  95.5,103 180 top
U$174  SEWTAP6  [PETAL-SMALL-2SIDE]  95.5,88 0 top
U$175  LOGO-LPL  [LOGO-L]  95.5,91.44 0 top

## Library data of the parts
C1-C25 E$1-E$8 JP1-JP50 R1-R25 U1-U25 = SparkFun
U$1-U$175 = LilyPad-Wearables

## Nets
GND: C1.2 U1.4 U$2.1
GND1: C2.2 U2.4 U$1.1
GND2: C3.2 U3.4 U$15.1
GND3: C4.2 U4.4 U$22.1
GND4: C5.2 U5.4 U$29.1
GND5: C6.2 U6.4 U$36.1
GND6: C7.2 U7.4 U$43.1
GND7: C8.2 U8.4 U$50.1
GND8: C9.2 U9.4 U$57.1
GND9: C10.2 U10.4 U$64.1
GND10: C11.2 U11.4 U$71.1
GND11: C12.2 U12.4 U$78.1
GND12: C13.2 U13.4 U$85.1
GND13: C14.2 U14.4 U$92.1
GND14: C15.2 U15.4 U$99.1
GND15: C16.2 U16.4 U$106.1
GND16: C17.2 U17.4 U$113.1
GND17: C18.2 U18.4 U$120.1
GND18: C19.2 U19.4 U$127.1
GND19: C20.2 U20.4 U$134.1
GND20: C21.2 U21.4 U$141.1
GND21: C22.2 U22.4 U$148.1
GND22: C23.2 U23.4 U$155.1
GND23: C24.2 U24.4 U$162.1
GND24: C25.2 U25.4 U$169.1
N$2: U2.5 U$13.1
N$3: U1.5 U$7.1
N$4: U1.6 U$3.1
N$5: U1.7 U$4.1
N$6: U1.2 U$6.1
N$10: U2.6 U$9.1
N$11: U2.7 U$10.1
N$12: U2.2 U$12.1
N$16: U3.5 U$20.1
N$17: U3.6 U$16.1
N$18: U3.7 U$17.1
N$19: U3.2 U$19.1
N$23: U4.5 U$27.1
N$24: U4.6 U$23.1
N$25: U4.7 U$24.1
N$26: U4.2 U$26.1
N$30: U5.5 U$34.1
N$31: U5.6 U$30.1
N$32: U5.7 U$31.1
N$33: U5.2 U$33.1
N$37: U6.5 U$41.1
N$38: U6.6 U$37.1
N$39: U6.7 U$38.1
N$40: U6.2 U$40.1
N$44: U7.5 U$48.1
N$45: U7.6 U$44.1
N$46: U7.7 U$45.1
N$47: U7.2 U$47.1
N$51: U8.5 U$55.1
N$52: U8.6 U$51.1
N$53: U8.7 U$52.1
N$54: U8.2 U$54.1
N$58: U9.5 U$62.1
N$59: U9.6 U$58.1
N$60: U9.7 U$59.1
N$61: U9.2 U$61.1
N$65: U10.5 U$69.1
N$66: U10.6 U$65.1
N$67: U10.7 U$66.1
N$68: U10.2 U$68.1
N$72: U11.5 U$76.1
N$73: U11.6 U$72.1
N$74: U11.7 U$73.1
N$75: U11.2 U$75.1
N$79: U12.5 U$83.1
N$80: U12.6 U$79.1
N$81: U12.7 U$80.1
N$82: U12.2 U$82.1
N$86: U13.5 U$90.1
N$87: U13.6 U$86.1
N$88: U13.7 U$87.1
N$89: U13.2 U$89.1
N$93: U14.5 U$97.1
N$94: U14.6 U$93.1
N$95: U14.7 U$94.1
N$96: U14.2 U$96.1
N$100: U15.5 U$104.1
N$101: U15.6 U$100.1
N$102: U15.7 U$101.1
N$103: U15.2 U$103.1
N$107: U16.5 U$111.1
N$108: U16.6 U$107.1
N$109: U16.7 U$108.1
N$110: U16.2 U$110.1
N$114: U17.5 U$118.1
N$115: U17.6 U$114.1
N$116: U17.7 U$115.1
N$117: U17.2 U$117.1
N$121: U18.5 U$125.1
N$122: U18.6 U$121.1
N$123: U18.7 U$122.1
N$124: U18.2 U$124.1
N$128: U19.5 U$132.1
N$129: U19.6 U$128.1
N$130: U19.7 U$129.1
N$131: U19.2 U$131.1
N$135: U20.5 U$139.1
N$136: U20.6 U$135.1
N$137: U20.7 U$136.1
N$138: U20.2 U$138.1
N$142: U21.5 U$146.1
N$143: U21.6 U$142.1
N$144: U21.7 U$143.1
N$145: U21.2 U$145.1
N$149: U22.5 U$153.1
N$150: U22.6 U$149.1
N$151: U22.7 U$150.1
N$152: U22.2 U$152.1
N$156: U23.5 U$160.1
N$157: U23.6 U$156.1
N$158: U23.7 U$157.1
N$159: U23.2 U$159.1
N$163: U24.5 U$167.1
N$164: U24.6 U$163.1
N$165: U24.7 U$164.1
N$166: U24.2 U$166.1
N$170: U25.5 U$174.1
N$171: U25.6 U$170.1
N$172: U25.7 U$171.1
N$173: U25.2 U$173.1
NRESET: R1.2 U1.1
NRESET1: R2.2 U2.1
NRESET2: R3.2 U3.1
NRESET3: R4.2 U4.1
NRESET4: R5.2 U5.1
NRESET5: R6.2 U6.1
NRESET6: R7.2 U7.1
NRESET7: R8.2 U8.1
NRESET8: R9.2 U9.1
NRESET9: R10.2 U10.1
NRESET10: R11.2 U11.1
NRESET11: R12.2 U12.1
NRESET12: R13.2 U13.1
NRESET13: R14.2 U14.1
NRESET14: R15.2 U15.1
NRESET15: R16.2 U16.1
NRESET16: R17.2 U17.1
NRESET17: R18.2 U18.1
NRESET18: R19.2 U19.1
NRESET19: R20.2 U20.1
NRESET20: R21.2 U21.1
NRESET21: R22.2 U22.1
NRESET22: R23.2 U23.1
NRESET23: R24.2 U24.1
NRESET24: R25.2 U25.1
VCC: C1.1 R1.1 U1.8 U$5.1
VCC1: C2.1 R2.1 U2.8 U$11.1
VCC2: C3.1 R3.1 U3.8 U$18.1
VCC3: C4.1 R4.1 U4.8 U$25.1
VCC4: C5.1 R5.1 U5.8 U$32.1
VCC5: C6.1 R6.1 U6.8 U$39.1
VCC6: C7.1 R7.1 U7.8 U$46.1
VCC7: C8.1 R8.1 U8.8 U$53.1
VCC8: C9.1 R9.1 U9.8 U$60.1
VCC9: C10.1 R10.1 U10.8 U$67.1
VCC10: C11.1 R11.1 U11.8 U$74.1
VCC11: C12.1 R12.1 U12.8 U$81.1
VCC12: C13.1 R13.1 U13.8 U$88.1
VCC13: C14.1 R14.1 U14.8 U$95.1
VCC14: C15.1 R15.1 U15.8 U$102.1
VCC15: C16.1 R16.1 U16.8 U$109.1
VCC16: C17.1 R17.1 U17.8 U$116.1
VCC17: C18.1 R18.1 U18.8 U$123.1
VCC18: C19.1 R19.1 U19.8 U$130.1
VCC19: C20.1 R20.1 U20.8 U$137.1
VCC20: C21.1 R21.1 U21.8 U$144.1
VCC21: C22.1 R22.1 U22.8 U$151.1
VCC22: C23.1 R23.1 U23.8 U$158.1
VCC23: C24.1 R24.1 U24.8 U$165.1
VCC24: C25.1 R25.1 U25.8 U$172.1